# EAGLE board FRDM-Motor_v1 (EAGLE 6.4)
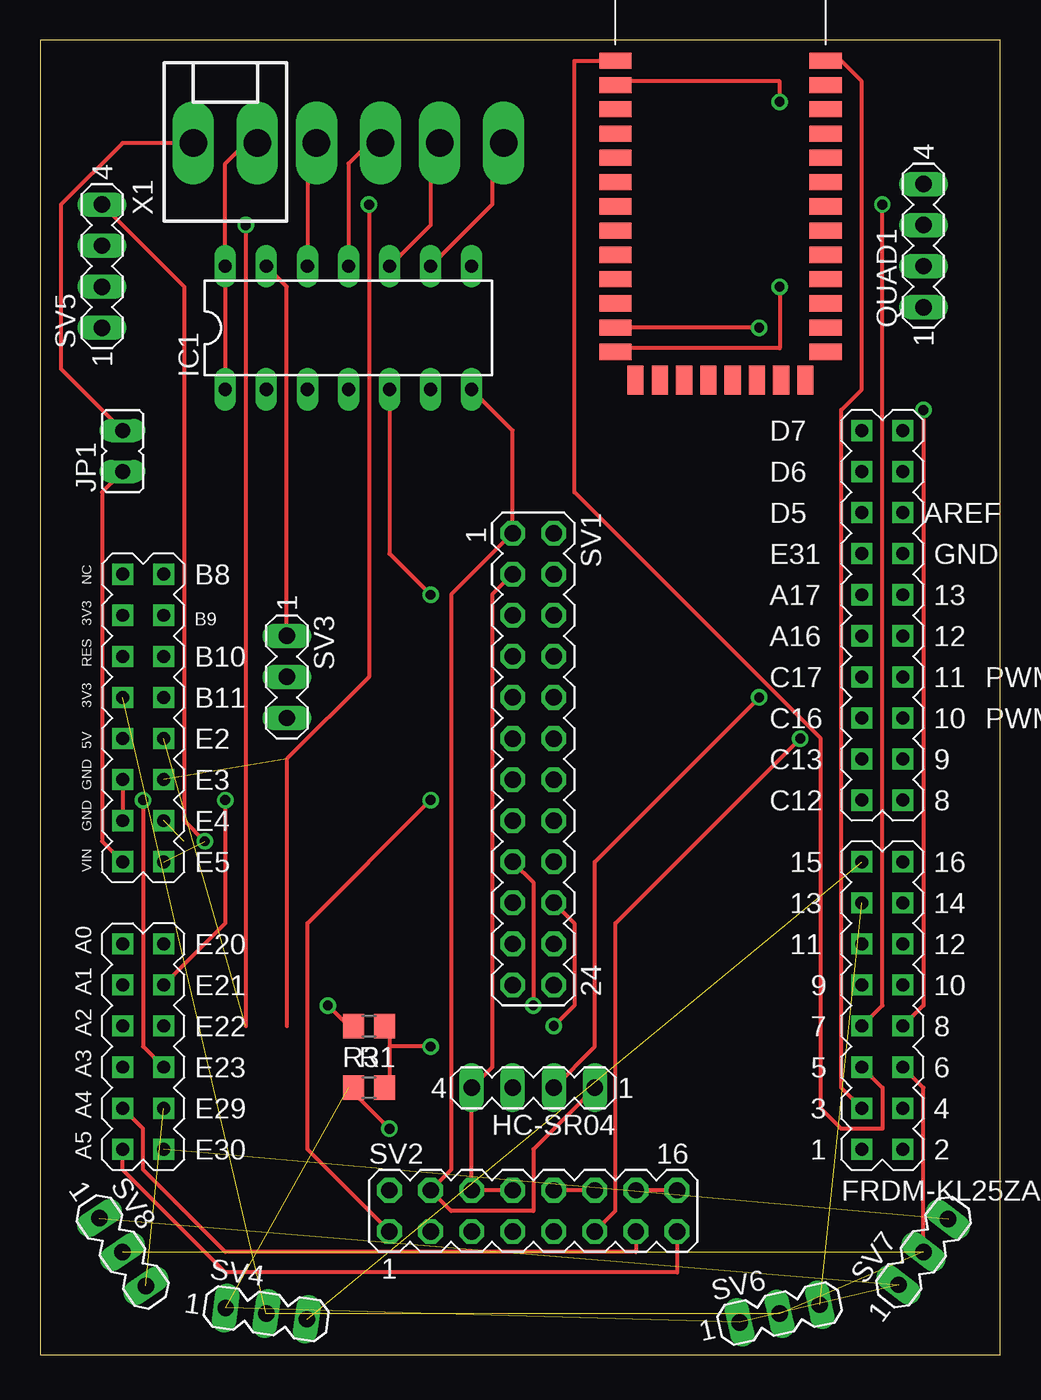
[diagram p0: board, top side]
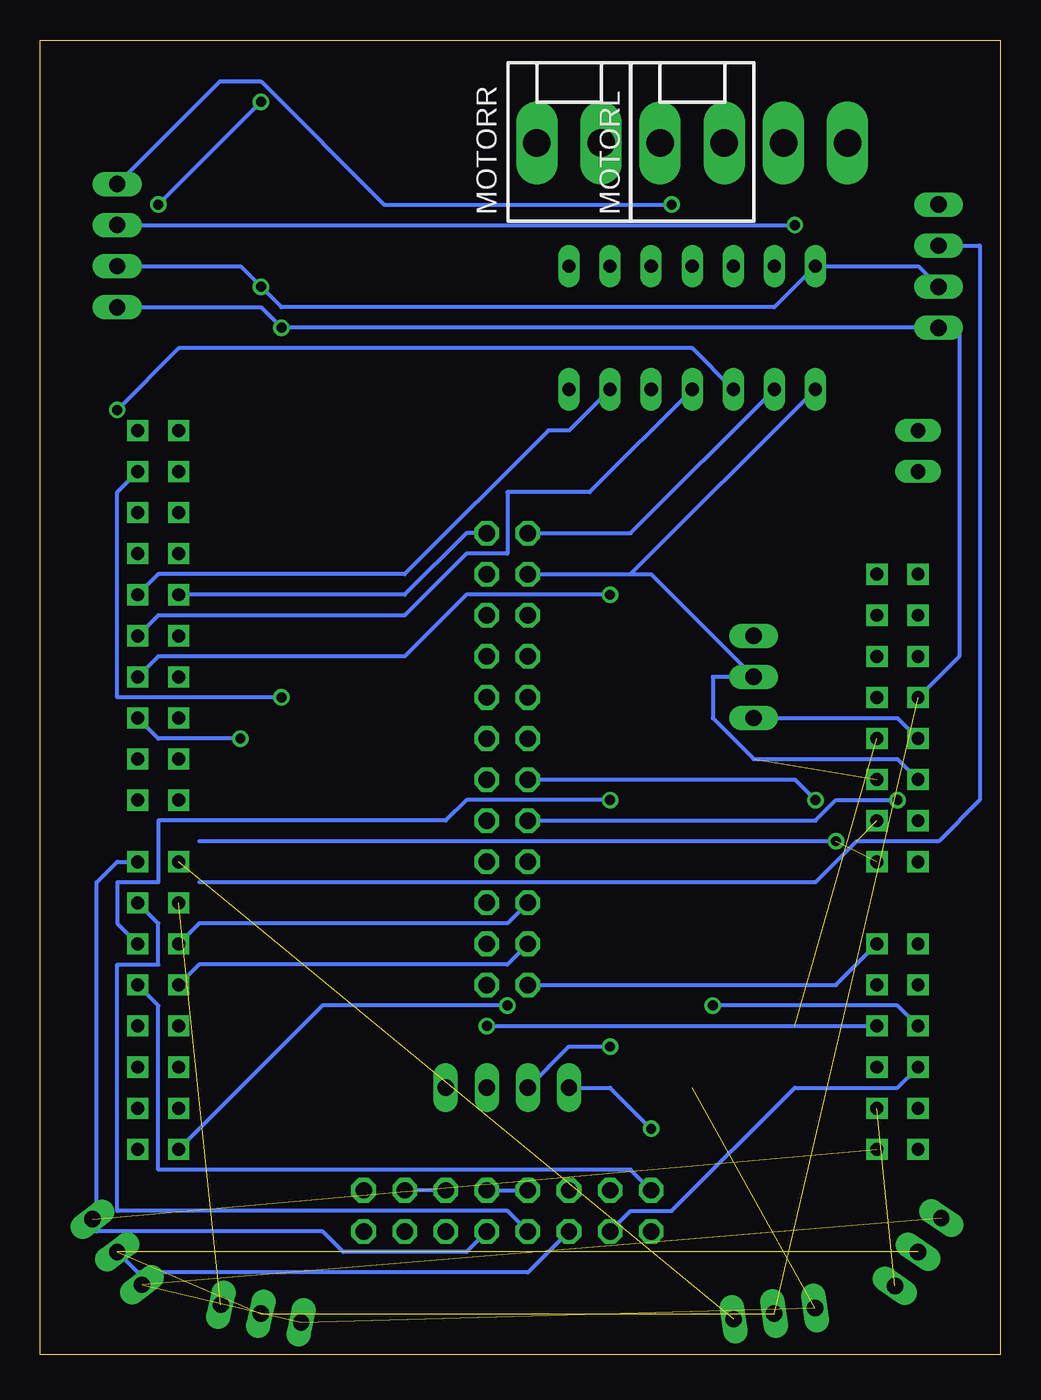
[diagram p1: board, bottom side, seen from below]

Size 59.36 x 81.27 mm. Coordinates in mm from the lower left corner, seen from the top.
Outline: 0,0 59.36,0 59.36,81.27 0,81.27 0,0
Copper layers (1*16): Top 0.035mm / dielectric 1.5mm / Bottom 0.035mm
Design rules "default": minimum track width 10mil, minimum drill 24mil, track to track 8mil, track to pad 8mil, pad to pad 8mil, via to via 8mil, smd to smd 8mil, copper to edge 40mil, drill to drill 8mil, minimum pad ring 10mil, minimum via ring 8mil, stop-mask expansion 4mil, vias tented up to drill 0mil, thermal gap 10mil

## Footprints (pad centres in the part's own frame; a part is rotated, then mirrored left to right if it is on the bottom)
FRDM-KL25Z = drill 0.8 square: 3V3 -22.86,12.7; 5V -22.86,5.08; A0 -22.86,-7.62; A1 -22.86,-10.16; A2 -22.86,-12.7; A3 -22.86,-15.24; A4 -22.86,-17.78; A5 -22.86,-20.32; AREF 25.4,19.05; D0 25.4,-20.32; D1 25.4,-17.78; D2 25.4,-15.24; D3 25.4,-12.7; D4 25.4,-10.16; D5 25.4,-7.62; D6 25.4,-5.08; D7 25.4,-2.54; D8 25.4,1.27; D9 25.4,3.81; D10 25.4,6.35; D11 25.4,8.89; D12 25.4,11.43; D13 25.4,13.97; D14 25.4,21.59; D15 25.4,24.13; GND0 -22.86,0; GND1 -22.86,2.54; GND2 25.4,16.51; NC -22.86,15.24; P3V3 -22.86,7.62; PTA16 22.86,11.43; PTA17 22.86,13.97; PTB8 -20.32,15.24; PTB9 -20.32,12.7; PTB10 -20.32,10.16; PTB11 -20.32,7.62; PTC0 22.86,-17.78; PTC3 22.86,-15.24; PTC4 22.86,-12.7; PTC5 22.86,-10.16; PTC6 22.86,-7.62; PTC7 22.86,-20.32; PTC10 22.86,-5.08; PTC11 22.86,-2.54; PTC12 22.86,1.27; PTC13 22.86,3.81; PTC16 22.86,6.35; PTC17 22.86,8.89; PTD5 22.86,19.05; PTD6 22.86,21.59; PTD7 22.86,24.13; PTE2 -20.32,5.08; PTE3 -20.32,2.54; PTE4 -20.32,0; PTE5 -20.32,-2.54; PTE20 -20.32,-7.62; PTE21 -20.32,-10.16; PTE22 -20.32,-12.7; PTE23 -20.32,-15.24; PTE29 -20.32,-17.78; PTE30 -20.32,-20.32; PTE31 22.86,16.51; RESET -22.86,10.16; VIN -22.86,-2.54
MA04-1 = drill 1.016 long: 1 -3.81,0; 2 -1.27,0; 3 1.27,0; 4 3.81,0
DIL14 = drill 0.813 long: 1 -7.62,-3.81; 2 -5.08,-3.81; 3 -2.54,-3.81; 4 0,-3.81; 5 2.54,-3.81; 6 5.08,-3.81; 7 7.62,-3.81; 8 7.62,3.81; 9 5.08,3.81; 10 2.54,3.81; 11 0,3.81; 12 -2.54,3.81; 13 -5.08,3.81; 14 -7.62,3.81
JP1 = drill 0.914 long: 1 0,-1.27; 2 0,1.27
KK-156-2 = drill 1.7 pad 2.184 long: 1 -1.98,0; 2 1.98,0
R0805 = smd 1.3 x 1.5: 1 -0.95,0; 2 0.95,0
MA12-2 = drill 1.016 octagon: 1 -13.97,-1.27; 2 -13.97,1.27; 3 -11.43,-1.27; 4 -11.43,1.27; 5 -8.89,-1.27; 6 -8.89,1.27; 7 -6.35,-1.27; 8 -6.35,1.27; 9 -3.81,-1.27; 10 -3.81,1.27; 11 -1.27,-1.27; 12 -1.27,1.27; 13 1.27,-1.27; 14 1.27,1.27; 15 3.81,-1.27; 16 3.81,1.27; 17 6.35,-1.27; 18 6.35,1.27; 19 8.89,-1.27; 20 8.89,1.27; 21 11.43,-1.27; 22 11.43,1.27; 23 13.97,-1.27; 24 13.97,1.27
MA08-2 = drill 1.016 octagon: 1 -8.89,-1.27; 2 -8.89,1.27; 3 -6.35,-1.27; 4 -6.35,1.27; 5 -3.81,-1.27; 6 -3.81,1.27; 7 -1.27,-1.27; 8 -1.27,1.27; 9 1.27,-1.27; 10 1.27,1.27; 11 3.81,-1.27; 12 3.81,1.27; 13 6.35,-1.27; 14 6.35,1.27; 15 8.89,-1.27; 16 8.89,1.27
MA03-1 = drill 1.016 long: 1 -2.54,0; 2 0,0; 3 2.54,0
BLUETOOTH_SMD = smd 2 x 1: 1 0,0; 2 0,-1.5; 3 0,-3; 4 0,-4.5; 5 0,-6; 6 0,-7.5; 7 0,-9; 8 0,-10.5; 9 0,-12; 10 0,-13.5; 11 0,-15; 12 0,-16.5; 13 0,-18; 22 13,-18; 23 13,-16.5; 24 13,-15; 25 13,-13.5; 26 13,-12; 27 13,-10.5; 28 13,-9; 29 13,-7.5; 30 13,-6; 31 13,-4.5; 32 13,-3; 33 13,-1.5; 34 13,0 | smd 1 x 1.8: 14 1.25,-19.75; 15 2.75,-19.75; 16 4.25,-19.75; 17 5.75,-19.75; 18 7.25,-19.75; 19 8.75,-19.75; 20 10.25,-19.75; 21 11.75,-19.75

## Placement (x,y rotation side)
FRDM1  FRDM-KL25ZARDUINO  [FRDM-KL25Z]  27.94,33.02 0 top
HC-SR04  SR04  [MA04-1]  30.48,16.51 180 top
IC1  DRV8835  [DIL14]  19.05,63.5 0 top
JP1  PWR  [JP1]  5.08,55.88 0 top
MOTORL  Left  [KK-156-2]  19.05,74.93 0 bottom
MOTORR  Right  [KK-156-2]  26.67,74.93 0 bottom
QUAD1  QUAD1  [MA04-1]  54.61,68.58 90 top
R1  27k  [R0805]  20.32,16.51 0 top
R3  15k  [R0805]  20.32,20.32 180 top
SV1  Radio  [MA12-2]  30.48,36.83 270 top
SV2  IR  [MA08-2]  30.48,8.89 0 top
SV3  S7V7F5  [MA03-1]  15.24,41.91 270 top
SV4  10cm  [MA03-1]  13.97,2.54 352 top
SV5  QUAD2  [MA04-1]  3.81,67.31 90 top
SV6  10cm  [MA03-1]  45.72,2.54 12.4 top
SV7  5cm  [MA03-1]  54.61,6.35 53 top
SV8  5cm  [MA03-1]  5.08,6.35 304.4 top
U1  HC_05  [BLUETOOTH_SMD]  35.56,80.01 0 top
X1  Bat  [KK-156-2]  11.43,74.93 0 top

## Library data of the parts
FRDM1 = Freedom
HC-SR04 QUAD1 SV1-SV8 = con-lstb; OC_FARNELL: unknown; OC_NEWARK: unknown
IC1 = ic-package
JP1 = jumper
MOTORL MOTORR X1 = con-molex; OC_FARNELL: unknown; OC_NEWARK: unknown
R1 R3 = eagle-ltspice; SPICEMODEL: NONE; SPICEPREFIX: R
U1 = Bluetooth HC-05

## Nets
3V3: FRDM1.P3V3 QUAD1.1 SV4.2 SV5.1 SV6.2 SV7.2 SV8.2 U1.12
5CM1: FRDM1.PTE29 SV8.3
5CM2: FRDM1.PTE30 SV7.3
5V: FRDM1.5V SV3.3
10CM1: FRDM1.PTC10 SV6.3
10CM2: FRDM1.PTC11 SV4.3
AOUT1: IC1.9 MOTORR.1
AOUT2: IC1.10 MOTORR.2
BAT: JP1.2 X1.1
BOUT1: IC1.11 MOTORL.1
BOUT2: IC1.12 MOTORL.2
BTCMD: FRDM1.PTC0 U1.34
BTRX: FRDM1.PTC4 U1.2
BTTX: FRDM1.PTC3 U1.1
C11: FRDM1.PTE2 QUAD1.3
C12: FRDM1.PTE3 QUAD1.4
C21: FRDM1.PTE4 SV5.3
C22: FRDM1.PTE5 SV5.4
DIRL: FRDM1.D12 IC1.4
DIRR: FRDM1.D13 IC1.6
ECHO: FRDM1.A2 R3.2
GND: FRDM1.GND0 FRDM1.GND1 HC-SR04.4 IC1.1 IC1.14 QUAD1.2 R1.1 SV1.3 SV2.6 SV2.8 SV2.10 SV2.12 SV2.14 SV2.16 SV3.2 SV4.1 SV5.2 SV6.1 SV7.1 SV8.1 U1.13 X1.2
IR1: FRDM1.D5 SV2.1
IR2: FRDM1.A3 SV2.3
IR3: FRDM1.D2 SV2.5
IR4: FRDM1.D6 SV2.7
IR5: FRDM1.D7 SV2.9
IR6: FRDM1.D10 SV2.11
IR7: FRDM1.A4 SV2.13
IR8: FRDM1.A5 SV2.15
IR_LED: FRDM1.D4 SV2.2
PWML: FRDM1.D3 IC1.3
PWMR: FRDM1.D11 IC1.5
RADIO_ATTN: FRDM1.PTE23 SV1.15
RADIO_CS: FRDM1.PTE20 SV1.23
RADIO_IRQ: FRDM1.PTA17 SV1.2
RADIO_MISO: FRDM1.PTC6 SV1.19
RADIO_MOSI: FRDM1.PTC7 SV1.17
RADIO_RES: FRDM1.PTE21 SV1.13
RADIO_RTXEN: FRDM1.PTE22 SV1.20
RADIO_SPICLK: FRDM1.PTC5 SV1.21
TRIG: FRDM1.D14 HC-SR04.2
UECHO: HC-SR04.3 R1.2 R3.1
VBAT: FRDM1.VIN JP1.1
VCC: HC-SR04.1 IC1.2 IC1.7 SV1.1 SV2.4
VIN: IC1.13 SV3.1

## Tracks (layer width: path | path; a pad name or v marks a point on that pad's centre or on a via)
3V3  (via drill 0.61)  (4 unrouted)
  Top 0.254: v44.45,63.5 U1.12
  Bottom 0.254: QUAD1.1 45.72,64.77 v44.45,63.5 SV5.1 2.54,63.5 2.54,43.18 FRDM1.P3V3
5CM1  (1 unrouted)
5CM2  (1 unrouted)
5V
  Bottom 0.254: FRDM1.5V 6.35,39.37 SV3.3
10CM1  (1 unrouted)
10CM2  (1 unrouted)
AOUT1
  Top 0.254: IC1.9 27.94,71.12 27.94,74.93 MOTORR.1
AOUT2
  Top 0.254: IC1.10 24.13,69.85 24.13,74.93 MOTORR.2
BAT
  Top 0.254: JP1.2 1.27,60.96 1.27,71.12 5.08,74.93 X1.1
BOUT1
  Top 0.254: IC1.11 19.05,73.66 20.32,74.93 MOTORL.1
BOUT2
  Top 0.254: IC1.12 16.51,74.93 MOTORL.2
BTCMD
  Top 0.254: FRDM1.PTC0 49.53,16.51 49.53,58.42 50.8,59.69 50.8,78.74 49.53,80.01 U1.34
BTRX  (via drill 0.61)
  Top 0.254: v45.72,77.47 45.72,78.74 35.56,78.74 U1.2 | v52.07,71.12 52.07,21.59 FRDM1.PTC4
  Bottom 0.254: v52.07,71.12 v45.72,77.47
BTTX
  Top 0.254: U1.1 33.02,80.01 33.02,53.34 48.26,38.1 48.26,15.24 49.53,13.97 52.07,13.97 52.07,16.51 FRDM1.PTC3
C11  (via drill 0.61)  (1 unrouted)
  Top 0.254: v12.7,69.85 12.7,20.32
  Bottom 0.254: QUAD1.3 v12.7,69.85
C12  (via drill 0.61)  (1 unrouted)
  Top 0.254: 15.24,20.32 15.24,36.83 20.32,41.91 v20.32,71.12
  Bottom 0.254: v20.32,71.12 38.1,71.12 45.72,78.74 48.26,78.74 QUAD1.4
C21  (1 unrouted)
  Bottom 0.254: 49.53,29.21 11.43,29.21 8.89,31.75 3.81,31.75 1.27,34.29 1.27,68.58 SV5.3
C22  (via drill 0.61)  (1 unrouted)
  Top 0.254: v10.16,31.75 8.89,33.02 8.89,66.04 SV5.4
  Bottom 0.254: v10.16,31.75 49.53,31.75
DIRL
  Bottom 0.254: FRDM1.D12 52.07,45.72 36.83,45.72 33.02,49.53 30.48,49.53 30.48,53.34 25.4,53.34 IC1.4
DIRR
  Bottom 0.254: FRDM1.D13 52.07,48.26 36.83,48.26 27.94,57.15 26.67,57.15 IC1.6
ECHO  (via drill 0.61)
  Top 0.254: v17.78,21.59 19.05,20.32 R3.2
  Bottom 0.254: v17.78,21.59 6.35,21.59 FRDM1.A2
GND  (via drill 0.61)  (4 unrouted)
  Top 0.254: v45.72,66.04 45.72,62.23 35.56,62.23 U1.13 | IC1.1 IC1.14 11.43,73.66 12.7,74.93 X1.2 | v21.59,13.97 19.05,16.51 R1.1 | SV2.16 SV2.14 | SV2.8 SV2.6 HC-SR04.4 27.94,17.78 27.94,46.99 SV1.3 | SV2.12 SV2.10 | FRDM1.GND1 FRDM1.GND0
  Bottom 0.254: QUAD1.2 46.99,67.31 v45.72,66.04 44.45,64.77 13.97,64.77 IC1.14 5.08,67.31 SV5.2 | v21.59,13.97 24.13,16.51 HC-SR04.4 | SV2.10 SV2.8 | SV2.12 SV2.14 | SV1.3 22.86,48.26 | 22.86,48.26 21.59,48.26 SV3.2 17.78,41.91 17.78,39.37 15.24,36.83 6.35,36.83 FRDM1.GND1 | 22.86,48.26 IC1.1
IR1  (via drill 0.61)
  Top 0.254: v24.13,34.29 16.51,26.67 16.51,12.7 SV2.1
  Bottom 0.254: FRDM1.D5 54.61,26.67 54.61,29.21 52.07,29.21 52.07,33.02 34.29,33.02 33.02,34.29 v24.13,34.29
IR2
  Bottom 0.254: FRDM1.A3 6.35,16.51 12.7,16.51 20.32,8.89 22.86,8.89 SV2.3
IR3  (via drill 0.61)
  Top 0.254: FRDM1.D2 54.61,16.51 v54.61,6.35
  Bottom 0.254: v54.61,6.35 53.34,5.08 29.21,5.08 SV2.5
IR4
  Bottom 0.254: FRDM1.D6 52.07,26.67 52.07,24.13 54.61,24.13 54.61,8.89 30.48,8.89 SV2.7
IR5
  Bottom 0.254: FRDM1.D7 54.61,30.48 55.88,29.21 55.88,7.62 41.91,7.62 40.64,6.35 33.02,6.35 SV2.9
IR6  (via drill 0.61)
  Top 0.254: v46.99,38.1 35.56,26.67 35.56,8.89 SV2.11
  Bottom 0.254: FRDM1.D10 52.07,38.1 v46.99,38.1
IR7
  Top 0.254: FRDM1.A4 6.35,13.97 6.35,11.43 11.43,6.35 36.83,6.35 SV2.13
IR8
  Top 0.254: FRDM1.A5 5.08,11.43 11.43,5.08 39.37,5.08 SV2.15
IR_LED
  Bottom 0.254: FRDM1.D4 52.07,21.59 52.07,11.43 22.86,11.43 SV2.2
PWML  (via drill 0.61)
  Top 0.254: FRDM1.D3 54.61,21.59 v54.61,58.42
  Bottom 0.254: v54.61,58.42 50.8,62.23 19.05,62.23 IC1.3
PWMR  (via drill 0.61)
  Top 0.254: v24.13,46.99 21.59,49.53 IC1.5
  Bottom 0.254: FRDM1.D11 52.07,43.18 36.83,43.18 33.02,46.99 v24.13,46.99
RADIO_ATTN  (via drill 0.61)
  Top 0.254: FRDM1.PTE23 6.35,19.05 v6.35,34.29
  Bottom 0.254: v6.35,34.29 10.16,34.29 11.43,33.02 SV1.15
RADIO_CS
  Bottom 0.254: FRDM1.PTE20 10.16,22.86 SV1.23
RADIO_IRQ
  Bottom 0.254: FRDM1.PTA17 36.83,46.99 33.02,50.8 SV1.2
RADIO_MISO
  Bottom 0.254: FRDM1.PTC6 49.53,26.67 30.48,26.67 SV1.19
RADIO_MOSI  (via drill 0.61)
  Top 0.254: v30.48,21.59 30.48,29.21 SV1.17
  Bottom 0.254: FRDM1.PTC7 41.91,21.59 v30.48,21.59
RADIO_RES  (via drill 0.61)
  Top 0.254: FRDM1.PTE21 11.43,26.67 v11.43,34.29
  Bottom 0.254: v11.43,34.29 12.7,35.56 SV1.13
RADIO_RTXEN  (via drill 0.61)
  Top 0.254: v31.75,20.32 33.02,21.59 33.02,26.67 SV1.20
  Bottom 0.254: v31.75,20.32 FRDM1.PTE22
RADIO_SPICLK
  Bottom 0.254: FRDM1.PTC5 49.53,24.13 30.48,24.13 SV1.21
TRIG  (via drill 0.61)
  Top 0.254: v44.45,40.64 34.29,30.48 34.29,19.05 HC-SR04.2
  Bottom 0.254: FRDM1.D14 54.61,53.34 54.61,40.64 v44.45,40.64
UECHO  (via drill 0.61)
  Top 0.254: 21.59,19.05 21.59,20.32 R3.1 | 21.59,19.05 21.59,16.51 R1.2 | v24.13,19.05 21.59,19.05
  Bottom 0.254: v24.13,19.05 26.67,19.05 HC-SR04.3
VBAT
  Top 0.254: FRDM1.VIN 3.81,31.75 3.81,53.34 JP1.1
VCC
  Top 0.254: HC-SR04.1 30.48,12.7 30.48,8.89 25.4,8.89 SV2.4 25.4,11.43 25.4,46.99 SV1.1 29.21,57.15 IC1.7
  Bottom 0.254: IC1.2 22.86,50.8 SV1.1
VIN
  Top 0.254: IC1.13 15.24,66.04 SV3.1